# Altium PCB PedalBox.PcbDoc (part 1 of 2)
Units mm, origin at the board's own origin, x right, y up, seen from the top; angles counter-clockwise.
Board outline 89.6 x 44.45 mm, 2 copper layers (Top Layer, Bottom Layer); 149 components, 99 nets, 491 pads, 141 vias.
Unrouted connection lines stored in the file: 1.
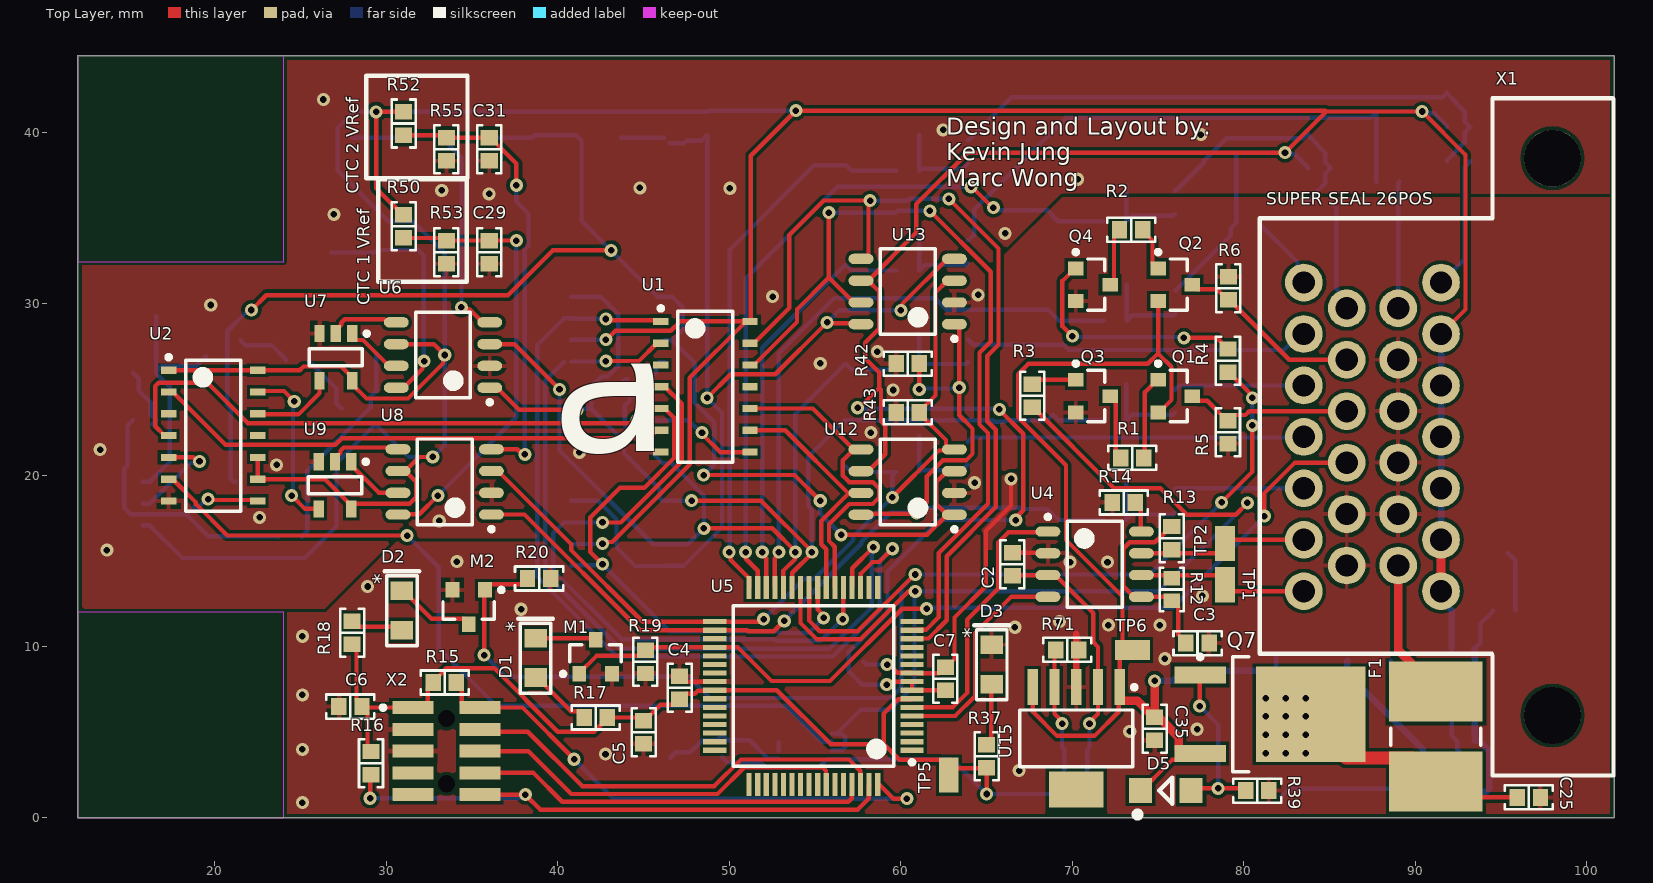
[diagram p0: Top Layer view]
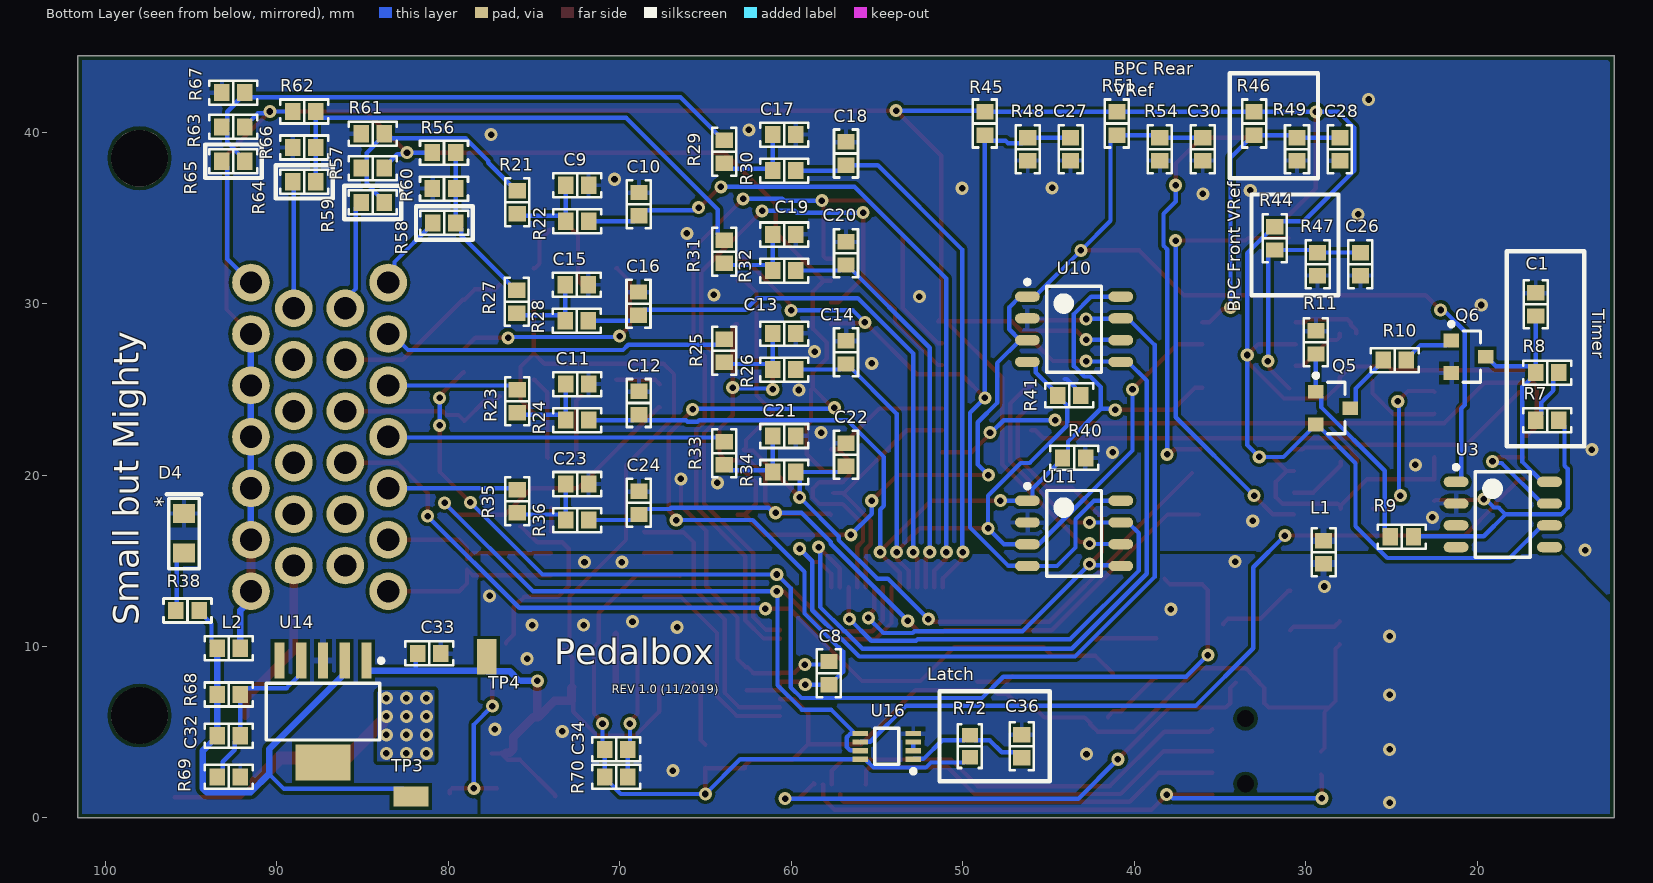
[diagram p1: Bottom Layer view, seen from below]
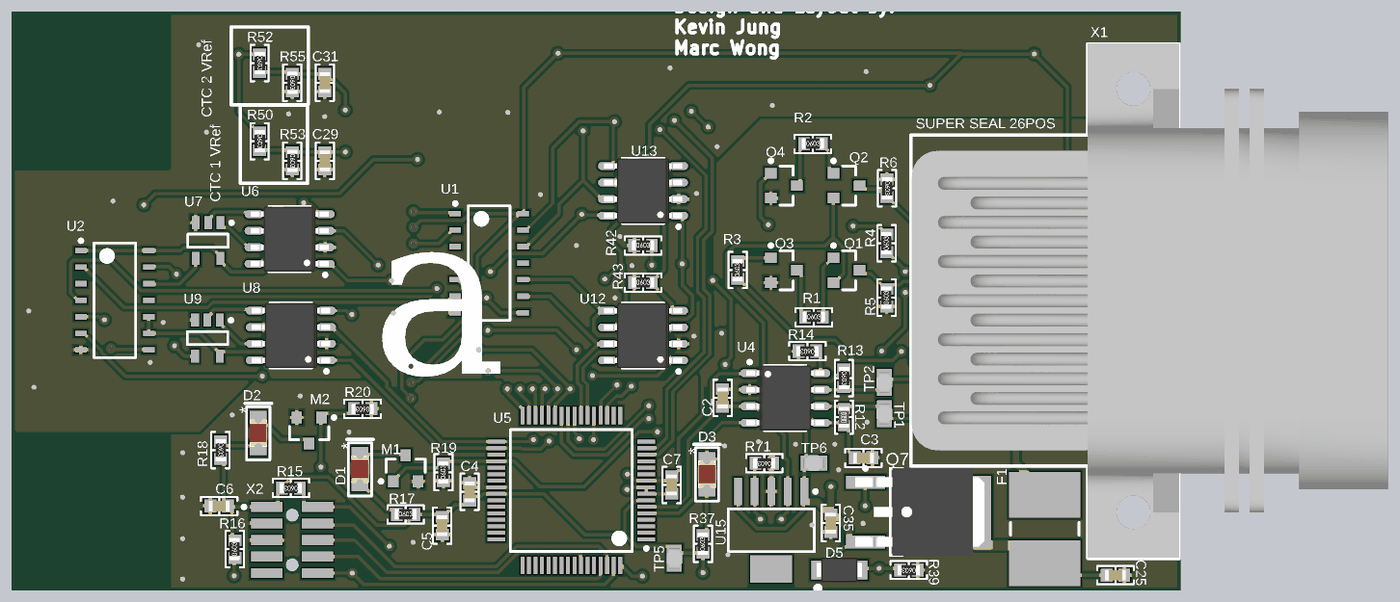
[diagram p3: 3D render of the assembled board from above, using the file's embedded part models]
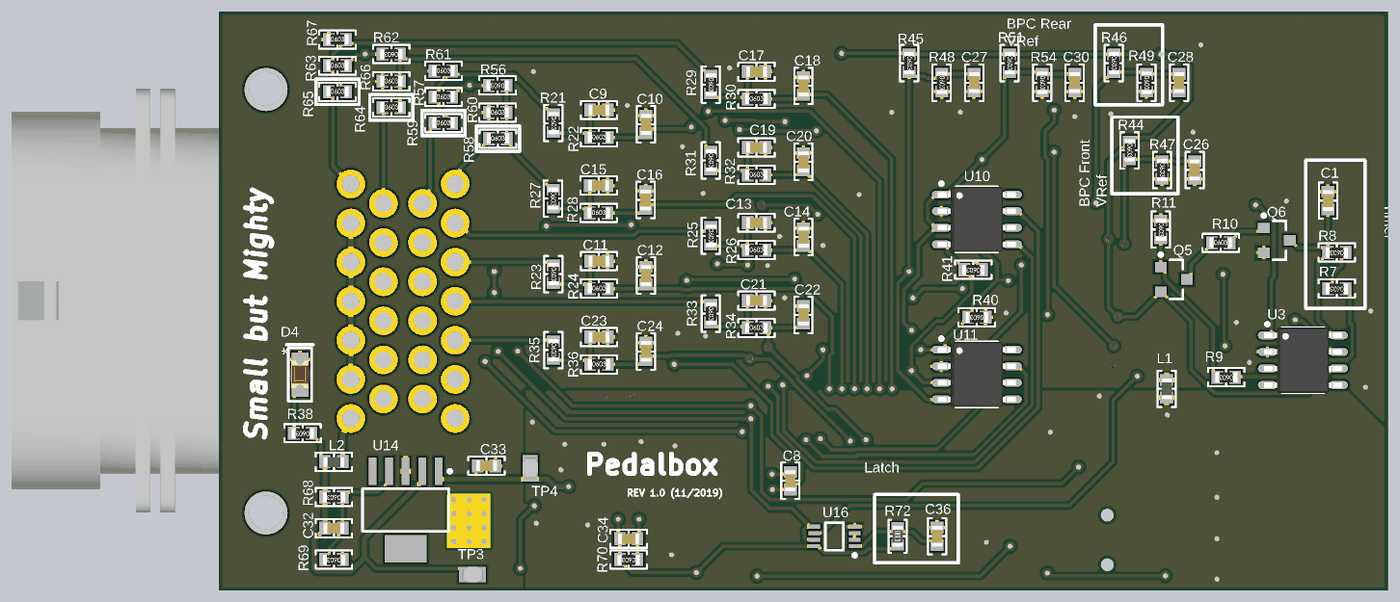
[diagram p4: 3D render of the assembled board from below, using the file's embedded part models]

## Layer stack, top to bottom
Top Solder: solder mask 0.0102, Solder Resist, Dk 3.5
Top Layer: signal copper 0.0356
Dielectric 1: dielectric 0.32, FR-4, Dk 4.8
Bottom Layer: signal copper 0.0356
Bottom Solder: solder mask 0.0102, Solder Resist, Dk 3.5

## Board outline
12,0 12,11.999 12,12 12,44.45 24,44.45 101.601,44.45 101.601,0

## Design rules (kind name [scope] priority, off if disabled: settings)
BoardOutlineClearance [All] p1: gap=0.254 ignorepadtopadclearanceinfootprint=FALSE except(0: Arc-SplitContinuation Track-SplitContinuation SMDPad-SplitContinuation THPad-SplitContinuation Via-SplitContinuation Fill-SplitContinuation Poly-SplitContinuation Region-SplitContinuation Text-SplitContinuation)
Clearance [All] p1: gap=0.203 ignorepadtopadclearanceinfootprint=FALSE except(0.152: SMDPad-SMDPad)
DiffPairsRouting [All] p1: maxlimit=0.254 minlimit=0.254 mostfreqgap=0.254 toplayer_minwidth=0.381 toplayer_maxwidth=0.381 toplayer_prefwidth=0.381 bottomlayer_minwidth=0.381 bottomlayer_maxwidth=0.381 bottomlayer_prefwidth=0.381 maxuncoupledlength=12.7
Height [All] p1: minheight=0 maxheight=38.1 prefheight=12.7
HoleSize [All] p1 off: absolutevalues=TRUE maxlimit=2.54 minlimit=0.025 maxpercent=80.000 minpercent=20.000
MinimumAnnularRing [All] p1: minimumring=0.152
MinimumSolderMaskSliver [All] p1: minsoldermaskwidth=0.1
PlaneConnect [All] p1: pad.planeconnectstyle=Relief pad.reliefexpansion=0.508 pad.reliefentries=4 pad.reliefconductorwidth=0.254 pad.reliefairgap=0.254 via.planeconnectstyle=Direct via.reliefexpansion=0.508 via.reliefentries=4 via.reliefconductorwidth=0.254 via.reliefairgap=0.254
PolygonConnect [All] p1: thpad.connectstyle=Relief thpad.reliefconductorwidth=0.254 thpad.reliefentries=4 thpad.polygonreliefangle="90 Angle" thpad.airgapwidth=0.254 smdpad.connectstyle=Relief smdpad.reliefconductorwidth=0.254 smdpad.reliefentries=4 smdpad.polygonreliefangle="90 Angle" smdpad.airgapwidth=0.254 via.connectstyle=Direct via.reliefconductorwidth=0.254 via.reliefentries=4 via.polygonreliefangle="90 Angle" via.airgapwidth=0.254
RoutingVias [All] p1: holewidth=0.381 width=0.762 viastyle="Through Hole" minholewidth=0.381 minwidth=0.762 maxholewidth=0.381 maxwidth=0.762
SilkToSilkClearance [All] p1 off: silktosilkclearance=0.254
SilkToSolderMaskClearance [IsPad] p1 off: minsilkscreentomaskgap=0.254 clearancetoexposedcopper=TRUE
SolderMaskExpansion [All] p1: expansion=0.102
UnRoutedNet [All] p1: checkbadconnections=TRUE
Width [All] p1: maxlimit=0.762 minlimit=0.203 preferedwidth=0.254 minimp=50.000000 maximp=50.000000 favimp=50.000000
22 further rules are at their usual default settings.

## Classes and differential pairs
component class U_LowLatch: C36 R72 U16
component class Accel_DivergentSignalOffset: R56 R57 R58 R59 R60 R61
component class Brake_DivergentSignalOffset: R62 R63 R64 R65 R66 R67
component class U_PassiveFilter2: C11 C12 R23 R24
component class U_PassiveFilter3: C13 C14 R25 R26
component class Pedalbox: D3 D4 F1 L1 L2 R37 R38
channel class SensorCheck: "Brake Pedal Check" "Current/Throttle Check"
channel class PassiveFilter: U_PassiveFilter1 U_PassiveFilter2 U_PassiveFilter3 U_PassiveFilter4 U_PassiveFilter5 U_PassiveFilter6 U_PassiveFilter7 U_PassiveFilter8
channel class DivergentSignalOffset: U_PassiveFilter3
channel class 12V_to_5V_LDO_1A: 5V_LDO_Analog 5V_LDO_Digital
component class U_PassiveFilter8: C23 C24 R35 R36
component class U_PassiveFilter7: C21 C22 R33 R34
component class U_PassiveFilter6: C19 C20 R31 R32
component class U_PassiveFilter5: C17 C18 R29 R30
component class U_PassiveFilter4: C15 C16 R27 R28
component class U_PassiveFilter1: C9 C10 R21 R22
component class RVPOVP: C25 D5 Q7 R39
component class PlausibilityTrigger: U6 U7 U8 U9
component class MCUPedalbox: C4 C5 C6 C7 C8 D1 D2 M1 M2 R15 R16 R17 R18 R19 R20 U5 X2
component class "Current/Throttle Check": R42 R43 U12 U13
component class CAN_5V: C2 C3 R12 R13 R14 TP1 TP2 U4
component class BSPD: C1 Q5 Q6 R7 R8 R9 R10 R11 U1 U2 U3
component class "Brake Pedal Check": R40 R41 U10 U11
component class VoltageReferenceGen: C26 C27 C28 C29 C30 C31 R44 R45 R46 R47 R48 R49 R50 R51 R52 R53 R54 R55
component class 26PinSuperseal: X1
component class 5V_LDO_Digital: C34 C35 R70 R71 TP5 TP6 U15
component class 5V_LDO_Analog: C32 C33 R68 R69 TP3 TP4 U14
component class 5V_12V_Logic: Q1 Q2 Q3 Q4 R1 R2 R3 R4 R5 R6
differential pair CAN: +CAN_P -CAN_N

## Components (designator, comment, footprint, x,y, rotation, side; value= is the part's Value field where it differs from the comment)
C1 "capacitor" 0603 16.575,29.95 r270 bottom (schematic designator C3)
C2 "capacitor" 0603 66.5,14.8 r270 top (schematic designator C1)
C3 "capacitor" 0603 77.3,10.2 r0 top (schematic designator C2)
C4 "capacitor" 0603 47.1,7.6 r270 top
C5 "capacitor" 0603 45,5 r90 top
C6 "capacitor" 0603 27.9,6.5 r0 top
C7 "capacitor" 0603 62.6,8.125 r270 top
C8 "capacitor" 0603 57.8,8.45 r270 bottom
C9 "capacitor" 0603 72.475,36.9 r0 bottom (schematic designator C12)
C10 "capacitor" 0603 68.875,35.8 r270 bottom (schematic designator C13)
C11 "capacitor" 0603 72.475,25.3 r0 bottom (schematic designator C12)
C12 "capacitor" 0603 68.875,24.2 r270 bottom (schematic designator C13)
C13 "capacitor" 0603 60.4,28.25 r0 bottom (schematic designator C12)
C14 "capacitor" 0603 56.8,27.15 r270 bottom (schematic designator C13)
C15 "capacitor" 0603 72.5,31.1 r0 bottom (schematic designator C12)
C16 "capacitor" 0603 68.9,30 r270 bottom (schematic designator C13)
C17 "capacitor" 0603 60.4,39.85 r0 bottom (schematic designator C12)
C18 "capacitor" 0603 56.8,38.75 r270 bottom (schematic designator C13)
C19 "capacitor" 0603 60.4,34.025 r0 bottom (schematic designator C12)
C20 "capacitor" 0603 56.8,32.925 r270 bottom (schematic designator C13)
C21 "capacitor" 0603 60.4,22.275 r0 bottom (schematic designator C12)
C22 "capacitor" 0603 56.8,21.175 r270 bottom (schematic designator C13)
C23 "capacitor" 0603 72.475,19.475 r0 bottom (schematic designator C12)
C24 "capacitor" 0603 68.875,18.375 r270 bottom (schematic designator C13)
C25 "capacitor" 0603 96.625,1.2 r180 top (schematic designator C12)
C26 "capacitor" 0603 26.8,32.3 r90 bottom (schematic designator C16)
C27 "capacitor" 0603 43.7,39 r90 bottom (schematic designator C14)
C28 "capacitor" 0603 28,39 r90 bottom (schematic designator C17)
C29 "capacitor" 0603 36,33 r90 top (schematic designator C18)
C30 "capacitor" 0603 36,39 r90 bottom (schematic designator C15)
C31 "capacitor" 0603 36,39 r90 top (schematic designator C19)
C32 "capacitor" 0603 92.8,4.8 r0 bottom (schematic designator C13)
C33 "capacitor" 0603 81.1,9.6 r0 bottom (schematic designator C14)
C34 "capacitor" 0603 70.2,4 r0 bottom (schematic designator C13)
C35 "capacitor" 0603 74.8,5.2 r90 top (schematic designator C14)
C36 "capacitor" 0603 46.55,4.187 r90 bottom (schematic designator C9)
D1 "LED" 0805_LED 38.7,9.336 r90 top
D2 "LED" 0805_LED 30.9,12.1 r90 top
D3 "LED" 0805_LED 65.3,8.95 r90 top (schematic designator D4)
D4 "LED" 0805_LED 95.4,16.6 r90 bottom (schematic designator D5)
D5 "" SOD123F 75.45,1.6 r180 top (schematic designator D2)
F1 "=I_trip" "PTC Fuse 2920/07351" 91.2,4.75 r270 top
L1 "MPZ1608S221ATA00" 0603 28.95,15.501 r90 bottom
L2 "MPZ1608S221ATA00" 0603 92.8,9.9 r180 bottom
M1 "" SOT23-3 42.2,9.4 r90 top
M2 "" SOT23-3 34.8,12.3 r270 top
Q1 "PNP Transistor" SOT23-3 76,24.6 r0 top (schematic designator Q4)
Q2 "PNP Transistor" SOT23-3 76,31.1 r0 top (schematic designator Q5)
Q3 "MMBT4401" SOT23-3 71.2,24.6 r0 top (schematic designator Q1)
Q4 "MMBT4401" SOT23-3 71.2,31.1 r0 top (schematic designator Q2)
Q5 "2SB815-6-TB-E_PNP" SOT23-3 28.4,23.9 r180 bottom (schematic designator Q6)
Q6 "MMBT4401" SOT23-3 20.5,26.9 r180 bottom (schematic designator Q3)
Q7 "DMP3010LK3-13" DMP3010LK3-13 81.55,6.05 r0 top
R1 "resistor" 0603 73.5,21 r0 top
R2 "resistor" 0603 73.425,34.3 r0 top
R3 "resistor" 0603 67.664,24.625 r90 top
R4 "resistor" 0603 79.075,26.675 r90 top
R5 "resistor" 0603 79.075,22.5 r90 top
R6 "resistor" 0603 79.1,30.9 r270 top
R7 "resistor" 0603 15.9,23.195 r0 bottom (schematic designator R9)
R8 "resistor" 0603 15.9,25.97 r0 bottom (schematic designator R10)
R9 "resistor" 0603 24.383,16.4 r0 bottom (schematic designator R11)
R10 "resistor" 0603 24.8,26.7 r180 bottom (schematic designator R12)
R11 "resistor" 0603 29.4,27.732 r270 bottom (schematic designator R13)
R12 "62" "RES 0603/1608" 75.8,13.325 r90 top (schematic designator R1)
R13 "resistor" 0603 75.8,16.325 r270 top (schematic designator R2)
R14 "resistor" 0603 73,18.4 r180 top (schematic designator R3)
R15 "resistor" 0603 33.4,7.9 r180 top (schematic designator R14)
R16 "resistor" 0603 29.1,3.204 r90 top (schematic designator R15)
R17 "resistor" 0603 42.2,5.86 r0 top (schematic designator R16)
R18 "resistor" 0603 28,10.8 r270 top (schematic designator R17)
R19 "resistor" 0603 45.1,9.1 r90 top (schematic designator R18)
R20 "resistor" 0603 38.9,13.968 r180 top (schematic designator R19)
R21 "resistor" 0603 75.975,35.9 r270 bottom (schematic designator R33)
R22 "resistor" 0603 72.475,34.8 r180 bottom (schematic designator R34)
R23 "resistor" 0603 75.975,24.3 r270 bottom (schematic designator R33)
R24 "resistor" 0603 72.475,23.2 r180 bottom (schematic designator R34)
R25 "resistor" 0603 63.9,27.25 r270 bottom (schematic designator R33)
R26 "resistor" 0603 60.4,26.15 r180 bottom (schematic designator R34)
R27 "resistor" 0603 76,30.1 r270 bottom (schematic designator R33)
R28 "resistor" 0603 72.5,29 r180 bottom (schematic designator R34)
R29 "resistor" 0603 63.9,38.85 r270 bottom (schematic designator R33)
R30 "resistor" 0603 60.4,37.75 r180 bottom (schematic designator R34)
R31 "resistor" 0603 63.9,33.025 r270 bottom (schematic designator R33)
R32 "resistor" 0603 60.4,31.925 r180 bottom (schematic designator R34)
R33 "resistor" 0603 63.9,21.275 r270 bottom
R34 "resistor" 0603 60.4,20.175 r180 bottom
R35 "resistor" 0603 75.975,18.475 r270 bottom (schematic designator R33)
R36 "resistor" 0603 72.475,17.375 r180 bottom (schematic designator R34)
R37 "resistor" 0603 65,3.6 r90 top (schematic designator R25)
R38 "resistor" 0603 95.2,12.1 r0 bottom (schematic designator R26)
R39 "resistor" 0603 80.775,1.6 r180 top (schematic designator R19)
R40 "resistor" 0603 43.5,21 r0 bottom (schematic designator R28)
R41 "resistor" 0603 43.775,24.647 r0 bottom (schematic designator R29)
R42 "resistor" 0603 60.4,26.5 r0 top (schematic designator R28)
R43 "resistor" 0603 60.4,23.65 r0 top (schematic designator R29)
R44 "resistor" 0603 31.8,33.8 r270 bottom (schematic designator R37)
R45 "resistor" 0603 48.7,40.5 r270 bottom (schematic designator R35)
R46 "resistor" 0603 33,40.5 r270 bottom (schematic designator R38)
R47 "resistor" 0603 29.3,32.3 r270 bottom (schematic designator R43)
R48 "resistor" 0603 46.2,39 r270 bottom (schematic designator R41)
R49 "resistor" 0603 30.5,39 r270 bottom (schematic designator R44)
R50 "resistor" 0603 31,34.5 r270 top (schematic designator R45)
R51 "resistor" 0603 41,40.5 r270 bottom (schematic designator R36)
R52 "resistor" 0603 31,40.5 r270 top (schematic designator R46)
R53 "resistor" 0603 33.5,33 r270 top (schematic designator R49)
R54 "resistor" 0603 38.5,39 r270 bottom (schematic designator R42)
R55 "resistor" 0603 33.5,39 r270 top (schematic designator R50)
R56 "resistor" 0603 80.242,38.8 r0 bottom (schematic designator R51)
R57 "resistor" 0603 84.4,37.9 r180 bottom (schematic designator R52)
R58 "resistor" 0603 80.225,34.7 r180 bottom (schematic designator R53)
R59 "resistor" 0603 84.4,35.9 r180 bottom (schematic designator R54)
R60 "resistor" 0603 80.242,36.7 r180 bottom (schematic designator R55)
R61 "resistor" 0603 84.4,39.9 r180 bottom (schematic designator R56)
R62 "resistor" 0603 88.4,41.2 r0 bottom (schematic designator R51)
R63 "resistor" 0603 92.525,40.3 r180 bottom (schematic designator R52)
R64 "resistor" 0603 88.4,37.1 r180 bottom (schematic designator R53)
R65 "resistor" 0603 92.525,38.3 r180 bottom (schematic designator R54)
R66 "resistor" 0603 88.4,39.1 r180 bottom (schematic designator R55)
R67 "resistor" 0603 92.525,42.3 r180 bottom (schematic designator R56)
R68 "resistor" 0603 92.8,7.2 r0 bottom (schematic designator R24)
R69 "resistor" 0603 92.8,2.4 r0 bottom (schematic designator R25)
R70 "resistor" 0603 70.2,2.4 r0 bottom (schematic designator R24)
R71 "resistor" 0603 69.7,9.8 r180 top (schematic designator R25)
R72 "" "RES 0603/1608" 49.575,4.187 r270 bottom (schematic designator R7)
TP1 "RCU-0C" RCU-0C 78.9,13.6 r180 top
TP2 "RCU-0C" RCU-0C 78.9,16 r180 top
TP3 "RCU-0C" RCU-0C 82.175,1.25 r270 bottom
TP4 "RCU-0C" RCU-0C 77.75,9.4 r180 bottom
TP5 "RCU-0C" RCU-0C 62.8,2.5 r180 top (schematic designator TP3)
TP6 "RCU-0C" RCU-0C 73.5,9.8 r90 top (schematic designator TP4)
U1 "74HC21D AND Gate" SOT108-1 48.6,25.148 r0 top (schematic designator U2)
U2 "" SOT108-1 19.9,22.3 r0 top (schematic designator U4)
U3 "LT1018 Dual Comparator" SOIC-8 18.5,17.7 r180 bottom (schematic designator U5)
U4 "MCP2561 CAN Transceiver" SOIC-8 71.3,14.8 r0 top (schematic designator U1)
U5 "MKE18F512VLH16" TQFP64 54.9,7.7 r180 top (schematic designator U7)
U6 "LT1018 Dual Comparator" SOIC-8 33.3,27 r180 top (schematic designator U8)
U7 "SN74LVC1G32 OR Gate" SOT23-5 27.05,26.875 r270 top (schematic designator U9)
U8 "LT1018 Dual Comparator" SOIC-8 33.4,19.6 r180 top (schematic designator U11)
U9 "SN74LVC1G32 OR Gate" SOT23-5 27,19.4 r270 top (schematic designator U12)
U10 "LT1018 Dual Comparator" SOIC-8 43.5,28.5 r180 bottom (schematic designator U13)
U11 "LT1018 Dual Comparator" SOIC-8 43.5,16.6 r180 bottom (schematic designator U14)
U12 "LT1018 Dual Comparator" SOIC-8 60.4,19.589 r180 top (schematic designator U13)
U13 "LT1018 Dual Comparator" SOIC-8 60.4,30.7 r180 top (schematic designator U14)
U14 "LDO-5Pin" SOT223-5 87.3,6.2 r270 bottom (schematic designator U6)
U15 "LDO-5Pin" SOT223-5 70.225,4.65 r270 top (schematic designator U6)
U16 "SN74LVC2G132DCUR" R-PDSO-G8 54.425,4.175 r0 bottom (schematic designator U3)
X1 "" "SUPERSEAL 26POS 90Deg" 98,5.975 r90 top locked
X2 "CN-2P-M-R10" HDR2X5_SMT 33.5,3.9 r270 top

## Footprints (in the part's own frame and the unit in brackets; to place one, negate y for a bottom-side part, rotate by r counter-clockwise, add the part's x,y. Pads: shape width x height; smd on the part's side, far side on the other; paste and mask are expansions set on the pad)
0603 [mm]
  rect 0.9x1 smd: 1(-0.675,0) 2(0.675,0)
  silkscreen extent -1.4,-0.7 1.4,0.7, body extent -0.8,-0.41 0.8,0.41, height 0.82
0805_LED [mm]
  rect 1.1x1.3 smd: 1(-1.15,0) 2(1.15,0)
  silkscreen extent -2.06,-1.02 2.29,1.02, body extent -1.05,-0.67 1.05,0.68, height 0.9
DMP3010LK3-13 [mm] "D-PAK, 3-Pads, Body 6.20x6.71mm (max), IPC Medium Density"
  rect 3x1 smd: 1(-4.1,2.29) 2(-4.1,-2.29)
  rect 6.4x5.55 smd: 3(2.35,0)
  silkscreen extent -4.22,-3.35 -1.25,3.46, body extent -4.86,-3.35 5.04,3.35, height 2.39
HDR2X5_SMT [mm] "Header, 10-Leads, Body 3.43x6.35mm, Pitch 1.27mm"
  rect 0.76x2.4 smd: 1(-2.54,-1.95) 2(-2.54,1.95) 3(-1.27,-1.95) 4(-1.27,1.95) 5(0,-1.95) 6(0,1.95) 7(1.27,-1.95) 8(1.27,1.95) 9(2.54,-1.95) 10(2.54,1.95)
  round 0 hole 1 unplated: MH1(-1.905,0) MH2(1.905,0)
  silkscreen extent -2.66,-3.82 -2.42,-3.57, body extent -3.18,-1.72 3.18,1.72, height 4.55
"PTC Fuse 2920/07351" [mm] "Chip PTC Fuse, 2-Leads, Body 7.36x5.12mm, IPC Medium Density"
  rect 3.5x5.45 smd: 1(-2.625,0) 2(2.625,0)
  silkscreen extent -0.5,-2.62 0.5,2.63, body extent -3.99,-2.72 3.99,2.72, height 1.25
R-PDSO-G8 [mm] "TSSOP, 8-Leads, Body 2.00x2.30mm, Pitch 0.50mm, IPC Medium Density SN74LVC2G132"
  rect 0.9x0.3 smd: 1(-1.55,0.75) 2(-1.55,0.25) 3(-1.55,-0.25) 4(-1.55,-0.75) 5(1.55,-0.75) 6(1.55,-0.25) 7(1.55,0.25) 8(1.55,0.75)
  silkscreen extent -1.67,-1.05 0.7,1.57, body extent -1.1,-1.05 1.1,1.05, height 0.9
RCU-0C [mm]
  rect 1.15x2.05 smd: 1(0,0)
  body extent -0.6,-0.77 0.6,0.82, height 1.16
"RES 0603/1608" [mm] "Chip Resistor, 2-Leads, Body 1.60x0.80mm, IPC Medium Density"
  rect 0.85x0.95 smd: 1(-0.65,0) 2(0.65,0)
  silkscreen extent -1.27,-0.7 1.27,0.7, body extent -0.8,-0.4 0.8,0.4, height 0.45
SOD123F [mm] "SODFL, 2-Leads, Body 1.80x3.50mm, IPC Low Density"
  rect 1.35x1.45 smd: 1(-1.475,0) 2(1.475,0)
  silkscreen extent -0.38,-0.76 1.75,1.5, body extent -1.75,-0.95 1.75,0.95, height 1.15
SOIC-8 [mm] "SOIC, 8-Leads, Body 4.90x3.90mm, Pitch 1.27mm, IPC Medium Density"
  oval 1.45x0.6 smd: 1(-2.725,1.905) 2(-2.725,0.635) 3(-2.725,-0.635) 4(-2.725,-1.905) 5(2.725,-1.905) 6(2.725,-0.635) 7(2.725,0.635) 8(2.725,1.905)
  silkscreen extent -2.85,-2.5 1.6,2.88, body extent -3,-2.5 3,2.5, height 1.75
SOT23-3 [mm] "SOT23, 3-Leads, Body 2.92x2.37mm, Pitch 0.95mm, IPC Medium Density, NUP2105L"
  rect 0.9x0.8 smd: 1(-1,0.95) 2(-1,-0.95) 3(1,0)
  silkscreen extent -1.12,-1.5 0.7,2.02, body extent -0.7,-1.52 0.7,1.52, height 1.11
SOT23-5 [mm] "SOT23, 5-Leads, Body 2.90x2.80mm, Pitch 0.95mm, IPC Medium Density, LP5907-3.3"
  rect 1x0.6 smd: 1(-1.375,0.95) 2(-1.375,0) 3(-1.375,-0.95) 4(1.375,-0.95) 5(1.375,0.95)
  silkscreen extent -1.5,-1.55 0.5,1.93, body extent -0.88,-1.52 0.87,1.53, height 1.45
SOT108-1 [mm]
  rect 0.889x0.42 smd: 1(-2.6,3.81) 2(-2.6,2.54) 3(-2.6,1.27) 4(-2.6,0) 5(-2.6,-1.27) 6(-2.6,-2.54) 7(-2.6,-3.81) 8(2.6,-3.81) 9(2.6,-2.54) 10(2.6,-1.27) 11(2.6,0) 12(2.6,1.27) 13(2.6,2.54) 14(2.6,3.81)
  silkscreen extent -2.72,-4.4 1.6,4.69, body extent -2,-4.4 2,4.4, height 1.75
SOT223-5 [mm] "SOT223-5 TPS7A45 Low-dropout regulator"
  rect 2.1x0.6 smd: 1(-2.975,2.54) 2(-2.975,1.27) 3(-2.975,0) 4(-2.975,-1.27) 5(-2.975,-2.54)
  rect 2.1x3.2 smd: ""(2.975,0)
  silkscreen extent -3.1,-3.3 1.65,3.51, body extent -1.78,-3.27 1.78,3.27, height 1.8
"SUPERSEAL 26POS 90Deg" [mm]
  round 2.2 hole 1.3: 1(7.25,14.5) 2(10.25,14.5) 3(13.25,14.5) 4(16.25,14.5) 5(19.25,14.5) 6(22.25,14.5) 7(25.25,14.5) 8(8.75,12) 9(11.75,12) 10(14.75,12) 11(17.75,12) 12(20.75,12) 13(23.75,12) 14(8.75,9) 15(11.75,9) 16(14.75,9) 17(17.75,9) 18(20.75,9) 19(23.75,9) 20(7.25,6.5) 21(10.25,6.5) 22(13.25,6.5) 23(16.25,6.5) 24(19.25,6.5) 25(22.25,6.5) 26(25.25,6.5)
  round 3.3 hole 3.3 unplated: CH(0,0) RH(32.5,0)
  silkscreen extent -3.5,-3.56 36,17.07, body extent -3.45,-19.5 36.05,17, height 27.91
TQFP64 [mm] "TSQFP, 64-Leads, Body 10.00x10.00mm, Pitch 0.50mm, IPC Medium Density, MKE18F512VLH16"
  rect 1.35x0.3 smd: 1(-5.75,3.75) 2(-5.75,3.25) 3(-5.75,2.75) 4(-5.75,2.25) 5(-5.75,1.75) 6(-5.75,1.25) 7(-5.75,0.75) 8(-5.75,0.25) 9(-5.75,-0.25) 10(-5.75,-0.75) 11(-5.75,-1.25) 12(-5.75,-1.75) 13(-5.75,-2.25) 14(-5.75,-2.75) 15(-5.75,-3.25) 16(-5.75,-3.75) 33(5.75,-3.75) 34(5.75,-3.25) 35(5.75,-2.75) 36(5.75,-2.25) 37(5.75,-1.75) 38(5.75,-1.25) 39(5.75,-0.75) 40(5.75,-0.25) 41(5.75,0.25) 42(5.75,0.75) 43(5.75,1.25) 44(5.75,1.75) 45(5.75,2.25) 46(5.75,2.75) 47(5.75,3.25) 48(5.75,3.75)
  rect 0.3x1.35 smd: 17(-3.75,-5.75) 18(-3.25,-5.75) 19(-2.75,-5.75) 20(-2.25,-5.75) 21(-1.75,-5.75) 22(-1.25,-5.75) 23(-0.75,-5.75) 24(-0.25,-5.75) 25(0.25,-5.75) 26(0.75,-5.75) 27(1.25,-5.75) 28(1.75,-5.75) 29(2.25,-5.75) 30(2.75,-5.75) 31(3.25,-5.75) 32(3.75,-5.75) 49(3.75,5.75) 50(3.25,5.75) 51(2.75,5.75) 52(2.25,5.75) 53(1.75,5.75) 54(1.25,5.75) 55(0.75,5.75) 56(0.25,5.75) 57(-0.25,5.75) 58(-0.75,5.75) 59(-1.25,5.75) 60(-1.75,5.75) 61(-2.25,5.75) 62(-2.75,5.75) 63(-3.25,5.75) 64(-3.75,5.75)
  silkscreen extent -5.88,-4.67 4.67,4.68, body extent -5,-5 5,5, height 1.6

## Part data
C1 C36: library part 1, "Generic 0603 capacitor", Dielectric=Ceramic, package=0603, percent tolerance=10, voltage=50, ESR=1, id=1, name="0603 Capacitor", quantity=0
C2 C4 C5 C6 C7 C8 C26 C27 C28 C29 C30 C31 C33 C35: library part 1, "Generic 0603 capacitor", capacitance=0.1uF, Dielectric=Ceramic, package=0603, percent tolerance=10, voltage=50, ESR=1, id=1, name="0603 Capacitor", quantity=0
C3: library part 1, "Generic 0603 capacitor", capacitance=4700pF, Dielectric=Ceramic, package=0603, percent tolerance=10, voltage=50, ESR=1, id=1, name="0603 Capacitor", quantity=0
C9 C10 C11 C12 C13 C14 C15 C16 C17 C18 C19 C20 C21 C22 C23 C24: library part 1, "Generic 0603 capacitor", capacitance=1.6uF, Dielectric=Ceramic, package=0603, percent tolerance=10, voltage=50, ESR=1, id=1, name="0603 Capacitor", quantity=0
C25 C32 C34: library part 1, "Generic 0603 capacitor", capacitance=0.01uF, Dielectric=Ceramic, package=0603, percent tolerance=10, voltage=50, ESR=1, id=1, name="0603 Capacitor", quantity=0
D1 D2 D3 D4: library part 19, "Generic 0805 LED", package=0805, id=19, name="0805 LED", numcircuits=1, quantity=0, vr=1
D5: library part 10, "Zener Diode 14V 500mW ±5% Surface Mount SOD-1", package=SOD-123, id=10, link=https://www.digikey.com/product-detail/en/diodes-incorporated/DDZ9701-7/DDZ9701-7DICT-ND/3877402, name=DDZ9701, quantity=0
F1: library part 11, "Polymeric PTC Resettable Fuse 24V 2A Ih Surfa", createdby=Kevin, id=11, iinterrupt=0, itrip=4, LatestRevisionDate=17-Jul-2002, LatestRevisionNote="Re-released for DXP Platform.", link=https://www.digikey.com/product-detail/en/bel-fuse-inc/0ZCF0200AF2C/507-1749-1-ND/4156183, name=0ZCF0200AF2C, PackageDescription="Thru-Hole; 2 Leads", PackageReference=PIN-W2/E2.8, Published=8-Jun-2000, Publisher="Altium Limited", quantity=0, vmax=24
L1 L2: library part 10, "220 Ohms @ 100MHz 1 Power Line Ferrite Bead 0", package=0603, resistance=50mOhm, Tolerance=0, createdby=Kevin, Digi-Key_Part_Number=445-1565-1-ND, Digi-Key_Purchase_URL=https://www.digikey.com/product-detail/en/tdk-corporation/MPZ1608S221ATA00/445-1565-1-ND/571895?utm_source=snapeda&utm_medium=aggregator&utm_campaign=symbol, id=10, imax=2.20000004768372, link=https://www.digikey.com/product-detail/en/tdk-corporation/MPZ1608S221ATA00/445-1565-1-ND/571895, MF=TDK, MP=MPZ1608S221ATA00, name=MPZ1608S221ATA00, quantity=0, SnapEDA_Link=https://www.snapeda.com/parts/MPZ1608S221ATA00/TDK-Lambda%20Americas%20Inc/view-part/?ref=snap
M1 M2: library part 6, "MOSFET N-CHANNEL 30V 5A SOT23", current=2.8A, package=SOT-23, id=6, link=https://www.digikey.com/product-detail/en/diodes-incorporated/DMG2302UK-7/DMG2302UK-7DICT-ND/6010163, name=DMG2302UK-7, numcircuits=1, quantity=0, rdson=90mOhm, Type=N_Channel, vdsmax=0, vgsmax=1, vt=800
Q1 Q2: library part 13, "Bipolar (BJT) Transistor PNP 25V 1.5A 100MHz", package=SOT23-3, Power=625, createdby=Kevin, createddate="10/16/2019 7:23:00 AM", id=13, link=https://www.digikey.com/product-detail/en/micro-commercial-co/MMSS8550-L-TP/MMSS8550-L-TPMSCT-ND/2827205, name=MMSS8550-L-TP, quantity=0, Type=PNP, vcemax=25
Q3 Q4: library part 2, package=SOT23-3, id=2, link=https://www.digikey.com/product-detail/en/diodes-incorporated/MMBT4401-7-F/MMBT4401-FDICT-ND/775867, name=MMBT4401, quantity=0, Type=NPN
Q5: library part 8, package="SMT 3-CP", beta=200, Ic=0.699999988079071, id=8, link=https://www.digikey.com/product-detail/en/on-semiconductor/2SB815-6-TB-E/2SB815-6-TB-EOSCT-ND/8538307, name="2SB815-6-TB-E PNP", quantity=0, Type=PNP, vcemax=15
Q6: library part 2, id=2, link=https://www.digikey.com/product-detail/en/on-semiconductor/MMBT4401/MMBT4401FSCT-ND/458974?utm_adgroup=Semiconductor%20Modules&slid=&gclid=Cj0KCQiAuf7fBRD7ARIsACqb8w6hHKWa-dWJhBKA9_nL8g4V_vyaEG2IBNoQt05KILQ9xMZ9NiOMdTcaAtxTEALw_wcB, name=MMBT4401, quantity=0, Type=NPN
Q7: library part 26, "P-Channel MOSFET 30V 17A TO252", current=17A, Manufacturer_id=1, package=TO-252-3, createdby=Kevin, Drawer_id=1, id=26, idFuse=3, link=https://www.digikey.com/product-detail/en/diodes-incorporated/DMP3010LK3-13/DMP3010LK3-13DICT-ND/3076574, name=DMP3010LK3-13, numcircuits=1, quantity=0, rdson=8mOhm, Type=P_Channel, vdsmax=30, vgsmax=20
R1 R2 R3 R4 R57 R60 R63 R66: library part 1, package=0603, percent tolerance=5, resistance=5k, id=1, name="0603 Resistor", quantity=0
R5 R6 R11 R15 R16 R19 R20 R39: library part 1, package=0603, percent tolerance=5, resistance=10k, id=1, name="0603 Resistor", quantity=0
R7 R8 R12 R44 R46 R47 R49 R50 R52 R53 R55 R72: library part 1, package=0603, percent tolerance=5, id=1, name="0603 Resistor", quantity=0
  R12: resistance=62
R9 R10 R17 R18 R56 R58 R59 R61 R62 R64 R65 R67: library part 1, package=0603, percent tolerance=5, resistance=1k, id=1, name="0603 Resistor", quantity=0
R13: library part 1, package=0603, percent tolerance=5, resistance=62, id=1, name="0603 Resistor", quantity=0
R14: library part 1, package=0603, percent tolerance=5, resistance=100, id=1, name="0603 Resistor", quantity=0
R21 R22 R23 R24 R25 R26 R27 R28 R29 R30 R31 R32 R33 R34 R35 R36: library part 1, package=0603, percent tolerance=5, resistance=1K, id=1, name="0603 Resistor", quantity=0
R37 R38: library part 1, package=0603, percent tolerance=5, resistance=1000, id=1, name="0603 Resistor", quantity=0
R40 R41 R42 R43: library part 1, package=0603, percent tolerance=5, resistance=100k, id=1, name="0603 Resistor", quantity=0
R45 R54: library part 1, package=0603, percent tolerance=5, resistance=18k, id=1, name="0603 Resistor", quantity=0
R48 R51: library part 1, package=0603, percent tolerance=5, resistance=2k, id=1, name="0603 Resistor", quantity=0
R68 R70: library part 1, package=0603, percent tolerance=5, resistance=43k, id=1, name="0603 Resistor", quantity=0
R69 R71: library part 1, package=0603, percent tolerance=5, resistance=15k, id=1, name="0603 Resistor", quantity=0
TP1 TP2 TP3 TP4 TP5 TP6: library part 14, id=14, link=https://www.digikey.com/product-detail/en/te-connectivity-amp-connectors/RCU-0C/A106145CT-ND/3477802, name=RCU-0C, numcontacts=1, numrows=1, quantity=0
U1 U2: library part 15, "74HC21D_AND_Gate", id=15, quantity=0
  U1: DualAND=CTC
  U2: DualAND=Plaus+BSPDAND
U3 U6 U8 U10 U11 U12 U13: library part 7, id=7, link=https://www.digikey.com/product-detail/en/lin, name=LT1018CS8#PBF, quantity=0
  U6: Comparator Designator=PT1
  U8: Comparator Designator=PT2
  U10 U12: Comparator Designator=SC1
  U11 U13: Comparator Designator=SC2
U4: library part 5, package=SOIC-8, id=5, link=https://www.digikey.com/product-detail/en/microchip-technology/MCP2561T-E-SN/MCP2561T-E-SNCT-ND/5148846, name=null, quantity=0, Type=CAN, vcc=0
U5: library part 1, "32b NXP Microcontroller", package=TQFP64, voltagemax=5.5, voltagemin=2.70000004768372, id=1, name=MKE18F512VLH16, quantity=0
U7 U9: library part 14, "SN74LVC1G32 OR GATE", id=14, quantity=0
U14 U15: library part 7, "1.3V-5V 1.A", package=SOT-223-6, id=7, imax=1, link=https://www.digikey.com/product-detail/en/texas-instruments/REG104GA-A/REG104GA-A-ND/380288?utm_adgroup=Integrated%20Circuits&slid=&gclid=CjwKCAjwpKveBRAwEiwAo4Pqm3P1cbCGhU8VzQ4hsaig_pQLQzWQ1vPK7ianKpgKPxk_g8_0T-ULMBoCGh8QAvD_BwE, name=REG104GA-A, quantity=0
U16: library part 12, "SN74LVC2G132DCUR 2channel NAND Gate", id=12, link=https://www.digikey.com/product-detail/en/texas-instruments/SN74LVC2G132DCUR/296-18802-1-ND/863928, name=SN74LVC2G132DCUR, quantity=0, updatedby=Kevin
X1: library part 21, "AMP Superseal 90Deg", id=21, link=https://www.te.com/usa-en/product-6437288-4.html#guest-click, name=6437288-4, numcontacts=26, numrows=4, Pitch=3mm, quantity=0
X2: library part 4, "CONN_TE_2X5POS", id=4, link=https://www.digikey.com/product-detail/en/5103309-1/A33160-ND/1114898?utm_campaign=buynow&WT.z_cid=ref_octopart_dkc_buynow&utm_medium=aggregator&curr=usd&site=us&utm_source=octopart, name=5103309-1, numcontacts=10, numrows=2, Pitch=2.54mm, quantity=0

## Via types
v1: diameter 0.762, hole 0.381, Top Layer to Bottom Layer, 141 vias

## Nets (pads, with @x,y where several pads share a name; then routed paths per layer and width w, separated by ;. In a path a pad name is that pad's centre, name@x,y a point inside that pad or via, vN(x,y) a via of type N, cw(c..) or ccw(c..) an arc to the next point about the centre after c; other vN are vias at no path point)
0.5V_REF: C27.2 R45.2 R48.1 U11.4 U11.8 U13.4 U13.8 | length 60.3
  Top Layer w0.254: v1(48.7,24.5) 50.078,25.878 52.678,25.878 v1(55.7,28.9) 55.753,28.847 57.623,28.847 U13.8@57.675,28.795 ; v1(60,29.6) 60.097,29.697 60.097,30.002 62.7,32.605 U13.4@63.125,32.605
  Bottom Layer w0.254: U11.8@40.775,18.505 42.336,18.505 43.418,17.423 43.418,15.777 44.499,14.695 U11.4@46.225,14.695 46.23,14.7 47.331,14.7 49.571,16.94 49.571,23.629 48.755,24.445 v1@48.7,24.445 ; C27.2@43.7,39.675 R48.1@46.2,39.675 ; R48.1@46.523,39.352 47.35,39.352 47.5,39.502 48.377,39.502 R45.2@48.7,39.825 v1(48.7,24.5) ; v1(55.7,28.9) 56.4,29.6 v1(60,29.6)
4.5V_REF: C30.2 R51.2 R54.1 U3.1 U10.1 U10.3 U12.1 U12.3 | length 83.9
  Top Layer w0.254: v1(22.125,29.625) 22.986,30.486 37.086,30.486 39.7,33.1 v1(43.104,33.1) ; v1(48.5,20) 53.8,20 v1(55.3,18.5) ; v1(56.52,16.512) 61.528,16.512 U12.1@62.7,17.684 ; U12.1@63.125,17.684 U12.1@62.7,17.684 ; U12.3@63.125,20.224 62.7,20.224 62.07,19.594 62.07,18.314 U12.1@62.7,17.684
  Bottom Layer w0.254: U3.1@21.225,19.605 21.087,19.605 20.927,19.765 20.927,23.876 20.72,24.083 20.72,28.387 21.958,29.625 v1(22.125,29.625) ; C30.2@36,39.675 R54.1@38.5,39.675 38.65,39.825 R51.2@41,39.825 41.05,39.825 41.373,39.502 41.373,34.831 v1(43.104,33.1) 45.799,30.405 U10.1@46.225,30.405 46.65,30.405 47.28,29.775 47.28,28.495 U10.3@46.65,27.865 ; U10.3@46.225,27.865 U10.3@46.65,27.865 ; v1(48.5,20) 49.114,20.614 49.114,23.081 47.989,24.205 47.989,26.526 U10.3@46.65,27.865 ; v1(55.3,18.5) 55.3,17.732 v1(56.52,16.512)
5Vin: C7.2 C8.2 L2.2 Q5.2 R44.1 R45.1 R46.1 R50.1 R51.1 R52.1 R56.2 R57.2 R62.2 R63.2 U1.14 U2.1 U2.9 U2.10 U2.14 U3.6 U5.8 U5.9 U6.6 U7.5 U8.6 U9.5 U10.6 U11.6 U12.6 U13.6 X1.20 X1.21 X1.22 X1.23 X1.24 X1.25 | length 323.2
  Top Layer w0.254: U2.1@17.3,26.11 U2.14@22.5,26.11 24.942,26.11 25.162,26.33 27.37,26.33 28,25.7 U7.5@28,25.5 28,25.3 28.835,24.465 31.261,24.465 33.303,26.507 33.303,26.903 v1(33.4,27) 32.765,27.635 U6.6@30.575,27.635 ; U2.10@22.5,21.03 U2.9@22.5,19.76 26.415,19.76 27.95,18.225 U9.5@27.95,18.162 ; U9.5@27.95,18.025 U9.5@27.95,18.162 ; U8.6@30.675,20.235 U8.6@31.1,20.235 ; R50.1@31,35.175 30.95,35.175 29.4,36.725 v1(29.4,41.175) R52.1@31,41.175 ; v1(32.7,21.056) 31.921,21.056 U8.6@31.1,20.235 ; v1(42.6,16) 42.697,16.097 43.174,16.097 47.689,20.612 47.689,25.682 U1.14@50.965,28.958 ; v1(42.8,27.9) 42.842,27.9 43.36,28.418 46.581,28.418 47.121,28.958 U1.14@50.965,28.958 ; v1(57.475,23.925) 57.58,23.925 58.73,25.075 ; U12.6@57.675,20.224 58.1,20.224 59.089,21.213 59.089,22.869 58.839,23.119 58.839,24.966 58.73,25.075 ; U13.6@57.675,31.335 U13.6@58.1,31.335 ; v1(59.175,7.775) 59.312,7.775 59.487,7.95 U5.9@60.65,7.95 U5.8@60.65,7.45 C7.2@62.6,7.45 ; v1(65.75,23.825) 65.75,23.8 67.136,22.414 67.136,17.949 66.7,17.512 v1(66.7,17.375) ; X1.25@91.5,28.225 92.93,29.655 92.93,38.67 v1(90.4,41.2) 84.8,41.2 ; U9.5@27.95,18.162 28.123,18.335 31.361,18.335 31.73,18.704 31.73,19.605 U8.6@31.1,20.235 ; U1.14@50.965,28.958 U1.14@51.2,28.958 51.434,28.958 51.25,29.142 51.25,38.625 v1(53.875,41.25) 84.75,41.25 84.8,41.2 ; U13.6@58.1,31.335 60.889,34.124 60.889,35.795 63.894,38.8 v1(82.4,38.8) 84.8,41.2 ; U13.6@58.1,31.335 58.73,30.705 58.73,28.534 57.913,27.717 57.913,26.804 58.73,25.988 58.73,25.075
  Top Layer w0.508: X1.20@91.5,13.225 X1.21@91.5,16.225
  Bottom Layer w0.254: U3.6@15.775,17.065 16.2,17.065 18.1,15.165 25.24,15.165 27.087,17.013 27.087,20.688 29.077,22.677 29.35,22.95 Q5.2@29.4,22.95 31.294,21.056 v1(32.7,21.056) 33.4,21.756 v1(33.4,27) 33.4,32.942 32.437,33.905 32.42,33.905 31.85,34.475 R44.1@31.8,34.475 31.477,34.798 30.11,34.798 27.17,37.738 27.17,40.262 28.083,41.175 v1(29.4,41.175) R46.1@33,41.175 R45.1@48.7,41.175 48.775,41.25 v1(53.875,41.25) ; U11.6@40.775,15.965 40.792,15.982 42.583,15.982 v1(42.6,16) ; U10.6@40.775,27.865 40.793,27.882 42.783,27.882 v1(42.8,27.9) ; v1(57.475,23.925) 57.525,23.875 65.7,23.875 v1(65.75,23.825) ; v1(59.175,7.775) C8.2@57.8,7.775 57.75,7.775 57.18,8.345 57.163,8.345 56.97,8.538 56.97,9.712 57.232,9.974 57.273,9.974 59.224,11.925 59.224,14.36 62.239,17.375 v1(66.7,17.375) ; R56.2@80.917,38.8 v1(82.4,38.8) 82.497,38.703 82.972,38.703 83.725,37.95 R57.2@83.725,37.9 ; R62.2@89.075,41.2 v1(90.4,41.2) 90.497,41.103 91.097,41.103 91.85,40.35 R63.2@91.85,40.3
  Bottom Layer w0.381: X1.20@91.5,13.225 91.5,12.733 92.125,12.108 L2.2@92.125,9.9 ; X1.21@91.5,16.225 X1.22@91.5,19.225 X1.23@91.5,22.225 X1.24@91.5,25.225 X1.25@91.5,28.225
"12V Rail": C33.2 C35.2 D5.2 Q1.2 Q2.2 Q7.2 TP4.1 TP6.1 U14.1 U14.5 U15.1 U15.5 | length 70
  Top Layer w0.254: U15.5@67.685,7.625 67.7,7.61 67.7,6.194 69.105,4.789 71.295,4.789 72.7,6.194 U15.1@72.7,6.869 ; U15.1@72.765,7.625 72.765,9.352 73.132,9.718 72.925,9.925 72.925,12.923 69.63,16.218 69.63,20.566 66.833,23.363 66.833,25.887 67.437,26.491 74.396,26.491 75,27.095 ; TP6.1@73.213,9.8 TP6.1@73.5,9.8 ; D5.2@73.75,1.275 73.75,1.325 75.812,3.387 76.527,3.387 76.9,3.76 Q7.2@77.45,3.76 ; Q1.2@75,23.65 75.05,23.65 75.78,24.38 75.78,26.315 75,27.095 ; Q2.2@75,30.15 75,27.095 ; Q7.2@76.625,3.8 76.91,3.8 Q7.2@76.925,3.785
  Top Layer w0.508: U15.1@72.765,7.625 72.811,7.579 72.811,6.829 73.796,6.829 74.75,5.875 C35.2@74.8,5.875 ; v1(74.8,8) C35.2@74.8,5.875 ; Q7.2@76.625,3.8 76.41,3.8 76.204,4.006 76.204,4.718 75.047,5.875 C35.2@74.8,5.875
  Bottom Layer w0.254: 81.9,8.575 C33.2@81.9,9.425
  Bottom Layer w0.381: v1(74.8,8) 75.852,8 76.417,8.565 77.74,8.565 77.75,8.575 81.9,8.575 U14.1@84.76,8.575
12V_Harness: F1.1 X1.14 | length 9.9
  Top Layer w0.508: X1.14@89,14.725 89,9.775 91.825,6.95 F1.1@91.825,5.975
ACC1_Filtered: C16.2 R28.2 U5.29 | length 34.6
  Top Layer w0.254: U5.29@52.65,13.45 52.65,15.13 52.883,15.363 v1(52.883,15.5)
  Bottom Layer w0.254: v1(52.883,15.5) 52.883,27.088 56.105,30.311 61.985,30.311 62.648,29.648 68.577,29.648 C16.2@68.9,29.325 69.223,29.002 71.823,29.002 R28.2@71.825,29
ACC1_Harness: R58.1 X1.7 | length 4.6
  Bottom Layer w0.254: R58.1@80.9,34.7 80.9,34.65 83.128,32.422 83.128,31.597 X1.7@83.5,31.225
ACC2_Filtered: C10.2 R22.2 U5.31 | length 42.2
  Top Layer w0.254: v1(50.952,15.5) 50.952,15.123 51.65,14.425 U5.31@51.65,13.45 ; v1(64.1,36.8) 64.148,36.8 65.348,35.6 v1(65.395,35.6)
  Bottom Layer w0.254: v1(50.952,15.5) 50.952,31.458 56.305,36.811 64.089,36.811 v1(64.1,36.8) ; v1(65.395,35.6) 65.532,35.6 65.684,35.448 68.552,35.448 C10.2@68.875,35.125 ; C10.2@68.825,35.125 69.148,34.802 71.798,34.802 R22.2@71.8,34.8
ACC2_Harness: R59.1 X1.13 | length 6.6
  Bottom Layer w0.254: R59.1@85.075,35.9 85.398,35.577 85.398,30.854 86,30.252 X1.13@86,29.725